# Altium PCB PCB1.PcbDoc (part 5 of 7)
Units mil, origin at the board's own origin, x right, y up, seen from the top; angles counter-clockwise.
Board outline 2100 x 2700 mil, 6 copper layers (Top Layer, Layer 2, Layer 3, Layer 4, Layer 5, Bottom Layer), stack 32.112 mil thick; 200 components, 319 nets, 1280 pads, 807 vias.
Unrouted connection lines stored in the file: 4.
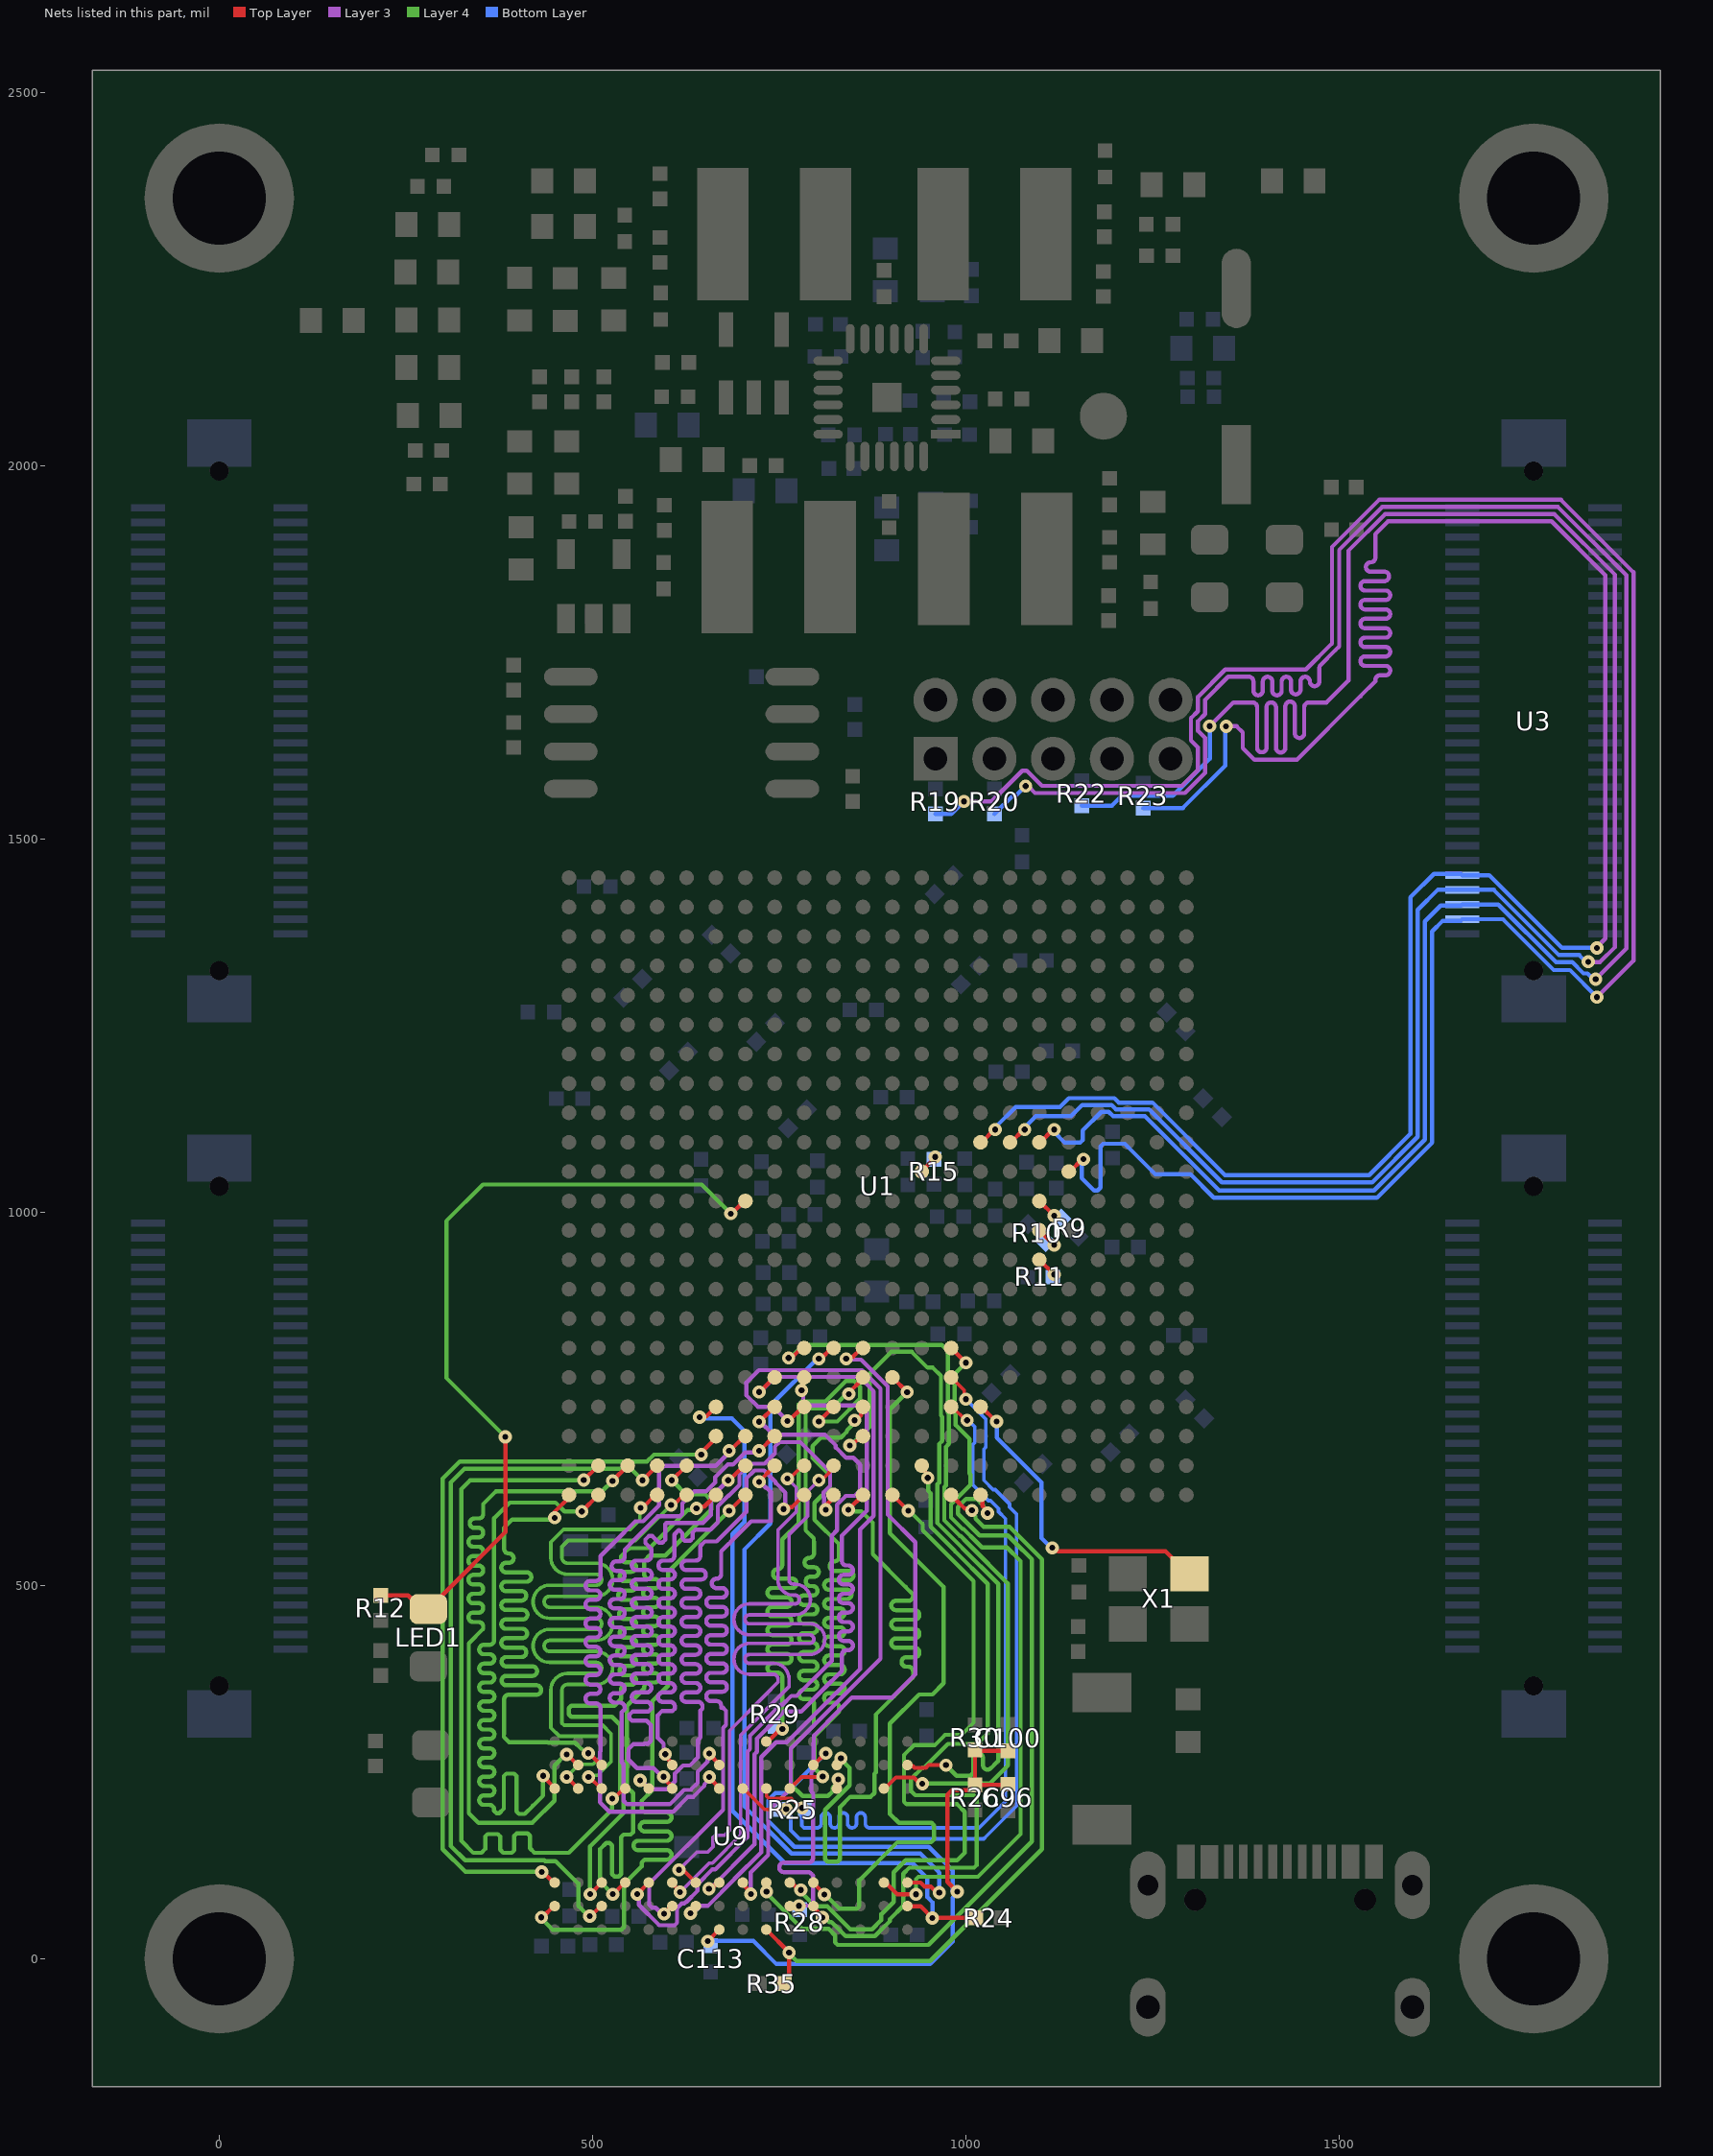
[diagram p9: the nets of this part, all layers, seen from the top]

## Via types
v1: diameter 17.7, hole 7.9, Top Layer to Bottom Layer, tented both sides, 807 vias

## Nets (pads, with @x,y where several pads share a name; then routed paths per layer and width w, separated by ;. In a path a pad name is that pad's centre, name@x,y a point inside that pad or via, vN(x,y) a via of type N, cw(c..) or ccw(c..) an arc to the next point about the centre after c; other vN are vias at no path point) (continued)
DDR3_A8: U1.L3 U9.T8 | length 981.2
  Top Layer w5.61: v1(844.29,687.33) 846.79,687.33 858.91,699.45 858.91,699.93 U1.L3@861.89,699.93 ; U9.T8@921.46,259.5 923.17,257.86 928.8,257.86 930.97,255.69 945.93,255.69 949.74,259.5 972.85,259.5 v1(973,259.34)
  Layer 4 w5.61: v1(844.29,687.33) 845.33,687.33 870.82,712.82 870.82,783.82 899.89,812.89 927.22,812.89 948.42,791.69 955.43,791.69 966.31,780.81 966.31,727.47 967.89,725.89 967.89,693.33 963.89,689.33 963.89,637.72 961.67,635.5 961.67,583.47 994.61,550.53 994.61,550.33 1043,501.94 1043,265 1041,263 1033.2,255.2 cw(c1028.74,259.65) 1022.43,259.65 1022.43,268.91 ccw(c1016.13,268.91) 1009.82,268.91 1009.82,251.3 cw(c1003.52,251.3) 1003.52,245 992,245 987.35,245 v1(973,259.34)
DDR3_A9: U1.P6 U9.R3 | length 978.1
  Top Layer w5.61: U9.R3@889.96,102.02 892.14,102.02 907.89,86.27 v1@932.85,86.27 ; U1.P6@980,818.04 v1(999.69,798.35)
  Layer 4 w5.61: v1@933,87 932.85,87.15 932.85,106.56 936.14,109.85 950,109.85 1015.85,109.85 1073,167 1073,532.52 1054.63,550.89 1021.23,550.89 1014.12,558 996.49,575.62 995.29,575.62 979.89,591.02 979.89,608.77 1005.83,634.71 1005.83,648.67 1004.65,649.85 1004.65,696.34 986.11,714.88 986.11,733.44 984.53,735.02 984.53,783.2 v1(999.69,798.35)
  other v1: 932.85,86.26
DDR3_A10: U1.L4 U9.L7 | length 1005.3
  Top Layer w5.61: U9.L7@763.98,228 764.3,227.99 779.83,243.52 807.6,243.52 v1(807.98,243.89) ; v1(850.62,721.23) 852.39,721.23 859.2,728.04 859.2,736.61 U1.L4@861.89,739.3
  Layer 4 w5.61: v1(807.98,243.89) 797,254.87 797,298 830,331 830,334 830,336.81 ccw(c823.69,336.81) 823.69,343.11 816.31,343.11 cw(c816.31,349.42) 816.31,355.72 831.08,355.72 ccw(c831.08,362.03) 831.08,368.33 816.31,368.33 cw(c816.31,374.64) 816.31,380.94 831.08,380.94 ccw(c831.08,387.25) 831.08,393.55 816.31,393.55 cw(c816.31,399.86) 816.31,406.16 831.08,406.16 ccw(c831.08,412.47) 831.08,418.77 816.31,418.77 cw(c816.31,425.08) 816.31,431.38 831.08,431.38 ccw(c831.08,437.69) 831.08,443.99 816.31,443.99 cw(c816.31,450.3) 816.31,456.6 831.08,456.6 ccw(c831.08,462.91) 831.08,469.21 816.31,469.21 cw(c816.31,475.52) 816.31,481.82 840.37,481.82 ccw(c840.37,488.13) 840.37,494.43 816.31,494.43 cw(c816.31,500.74) 816.31,507.04 842.88,507.04 ccw(c842.88,513.35) 842.88,519.65 823.69,519.65 cw(c823.69,525.96) 823.69,532.26 ccw(c823.69,538.57) 830,538.57 830,551 830,555 797,588 797,610.56 817.89,631.45 817.89,647.15 794.22,670.82 794.22,686.52 805.7,698 832.43,698 840.37,705.94 840.37,707.71 850.62,717.96 v1(850.62,721.23)
DDR3_A11: U1.J6 U9.R7 | length 1029.7
  Top Layer w5.61: v1(762.3,804.74) 764.62,807.05 768.35,807.05 779.34,818.04 U1.J6@783.15,818.04 ; U9.R7@889.96,228 891.18,227.99 906.08,242.89 929.91,242.89 938.21,234.59 v1(941.48,234.59)
  Layer 4 w5.61: v1(762.3,804.74) 764.62,804.74 781.89,822 967.49,822 975.42,814.07 975.42,731.24 977,729.66 977,689.56 973,685.56 973,633.95 970.78,631.73 970.78,587.25 991.51,566.51 992.22,566.51 1000.73,558 1004.51,554.23 1004.51,554.02 1056,502.53 1056,259 1031.59,234.59 v1(941.48,234.59)
DDR3_A12: U1.L5 U9.N7 | length 981.2
  Top Layer w5.61: U9.N7@826.97,228 827.91,228.93 827.91,239.21 v1(828.85,240.15) ; v1(842.85,756.41) 842.85,758.02 861.89,777.06 U1.L5@861.89,778.67
  Layer 4 w5.61: 796,558 796,563 785.11,573.89 785.11,733.66 788.4,736.95 820.17,736.95 839.63,756.41 v1(842.85,756.41) ; 796.31,558.74 796.31,543.3 cw(c790,543.3) 790,537 ccw(c790,530.7) 790,524.39 796.31,524.39 cw(c796.31,518.09) 796.31,511.78 791.55,511.78 ccw(c791.55,505.47) 791.55,499.17 794.7,499.17 cw(c794.7,492.86) 794.7,486.56 782.61,486.56 ccw(c782.61,480.26) 782.61,473.95 794.68,473.95 cw(c794.68,467.64) 794.68,461.34 782.61,461.34 ccw(c782.61,455.03) 782.61,448.73 794.65,448.73 cw(c794.65,442.43) 794.65,436.12 782.61,436.12 ccw(c782.61,429.82) 782.61,423.51 794.61,423.51 cw(c794.61,417.2) 794.61,410.9 782.61,410.9 ccw(c782.61,404.59) 782.61,398.29 794.56,398.29 cw(c794.56,391.99) 794.56,385.68 782.61,385.68 ccw(c782.61,379.38) 782.61,373.07 794.5,373.07 cw(c794.5,366.76) 794.5,360.46 782.61,360.46 ccw(c782.61,354.16) 782.61,347.85 790,347.85 cw(c790,341.55) 796.31,341.55 796.31,338.74 796.31,333.31 796,333 796,312.89 765.31,282.2 765.31,233.69 781,218 815.12,218 821.08,223.97 821.08,229.12 828.85,236.88 v1(828.85,240.15)
DDR3_A13: U1.K6 U9.T3 | length 1040.5
  Top Layer w5.61: v1(802.83,803.57) 805.44,803.57 819.91,818.04 U1.K6@822.52,818.04 ; U9.T3@921.46,102.02 939.06,102.02 944.41,96.67 952.87,96.67 960.88,88.66 v1(964.15,88.66)
  Bottom Layer w5.61: v1@802,805 738,741 738,583 703,548 703,333 703,204.12 766.23,140.89 938.77,140.89 950,129.66 964.15,115.51 v1(964.15,88.66)
DDR3_BA0: U1.N2 U9.M2 | length 1024.4
  Top Layer w5.61: U9.M2@795.48,70.51 795.48,68.98 807.71,56.75 v1(807.71,55.22) ; U1.N2@940.63,660.56 940.63,656.75 946.42,650.96 946.42,646.31 v1(948.73,644)
  Layer 4 w5.61: v1(807.71,55.22) 810.98,55.22 817.03,49.17 819.68,49.17 838.54,30.31 877.84,30.31 898.11,50.58 898.11,53.11 916,71 916,114 924,122 950,122 1010.71,122 1014,125.29 1014,215.71 1010.71,219 950,219 932,219 926,225 926,240.54 941.15,255.69 943.52,255.69 950,262.17 975.6,287.77 1014.77,287.77 1029,302 1029,502 985,546 985,546.55 952.56,578.99 952.56,623.37 949.2,626.74 949.2,643.54 v1(948.73,644)
DDR3_BA1: U1.L1 U9.N8 | length 997.4
  Top Layer w5.61: U9.N8@826.97,259.5 826.97,261.33 832.28,266.64 v1(832.28,268.47) ; v1(842.47,601.5) 842.47,601.63 861.89,621.06 U1.L1@861.89,621.19
  Layer 4 w5.61: v1(832.28,268.47) 832.28,267.46 844,255.74 844,232.27 811.14,199.41 811.14,133.43 814.43,130.14 827.71,130.14 831,133.43 831,203 845,217 872.27,217 877.31,222.04 877.31,247.85 879.03,249.57 879.03,327.03 903.92,351.92 929,377 929,384.93 ccw(c922.69,384.93) 922.69,391.23 919.86,391.23 cw(c919.86,397.54) 919.86,403.84 931.09,403.84 ccw(c931.09,410.15) 931.09,416.45 906.1,416.45 cw(c906.1,422.76) 906.1,429.06 931.09,429.06 ccw(c931.09,435.37) 931.09,441.67 906.1,441.67 cw(c906.1,447.98) 906.1,454.28 931.09,454.28 ccw(c931.09,460.59) 931.09,466.89 906.1,466.89 cw(c906.1,473.2) 906.1,479.5 922.69,479.5 ccw(c922.69,485.81) 929,485.81 929,488 918.93,498.07 875,542 875,584 859.73,599.27 844.7,599.27 v1(842.47,601.5)
DDR3_BA2: U1.M5 U9.M3 | length 992.3
  Top Layer w5.61: U9.M3@795.48,102.01 795.48,101.4 810.15,86.73 v1(810.15,86.12) ; U1.M5@901.26,778.67 v1(920.95,758.98)
  Layer 4 w5.61: v1(810.15,86.12) 811.13,86.12 830.33,66.91 853.71,66.91 857,70.2 857,105 908,156 953,156 957,160 957,178.71 953.71,182 910,182 898,194 898,315 937,354 955,354 970,369 970,498 898,570 898,736.04 v1(920.95,758.98)
DDR3_CAS_N: U1.R1 U9.K3 | length 1055
  Top Layer w5.61: U9.K3@732.48,102.02 732.65,101.85 732.65,90.12 v1(732.82,89.95) ; U1.R1@1019.37,621.19 1022.06,618.5 1022.06,606.21 1028.72,599.55 v1(1028.72,596.88)
  Layer 4 w5.61: v1(732.82,89.95) 732.82,87.89 780.64,40.07 815.9,40.07 824.78,31.19 824.78,21.92 828.07,18.63 949.63,18.63 950,19 1088,157 1088,535.07 1065.07,558 1056.07,567 1018,567 989,596 989,605 1000,616 1013.76,616 1022.99,606.77 1022.99,605.88 1028.72,600.15 v1(1028.72,596.88)
DDR3_CKE: R29.1 U1.K4 U9.K9 | length 980.3
  Top Layer w5.61: U9.K9@732.48,290.99 734.78,290.98 751.44,307.64 v1(753.95,307.64) ; v1(802.88,719.61) U1.K4@822.52,739.3
  Layer 4 w5.61: v1(753.95,307.64) 753.95,333 753.95,374 753.95,376.81 ccw(c747.65,376.81) 747.65,383.11 740.26,383.11 cw(c740.26,389.42) 740.26,395.72 760.08,395.72 ccw(c760.08,402.03) 760.08,408.33 740.26,408.33 cw(c740.26,414.64) 740.26,420.94 760.08,420.94 ccw(c760.08,427.25) 760.08,433.55 740.26,433.55 cw(c740.26,439.86) 740.26,446.16 760.08,446.16 ccw(c760.08,452.47) 760.08,458.77 740.26,458.77 cw(c740.26,465.08) 740.26,471.38 760.08,471.38 ccw(c760.08,477.69) 760.08,483.99 740.26,483.99 cw(c740.26,490.3) 740.26,496.6 766.69,496.6 ccw(c766.69,502.91) 766.69,509.21 747.65,509.21 cw(c747.65,515.52) 747.65,521.82 ccw(c747.65,528.13) 753.95,528.13 753.95,552 753.95,558 753.95,561.95 776,584 776,742.77 779.29,746.06 811.06,746.06 839,774 850,774 858,766 858,750.04 827.58,719.61 v1(802.88,719.61)
DDR3_CLK_N: R25.1 U1.P4 U9.K7 | length 1031.8
  Top Layer w4.77: U9.K7@732.48,228 732.9,227.58 732.9,217.82 735.69,215.02 765.27,215.02 778.27,202.02 v1(780.28,202.02) ; U1.P4@980,739.3 981.56,739.3 999.7,721.16 v1(1001.27,721.16)
  Bottom Layer w4.77: v1(780.28,202.02) 780,201.74 780,178.11 781,177.11 782.79,175.32 800.22,175.32 ccw(c800.22,181.2) 806.11,181.2 806.11,189.43 cw(c811.99,189.43) 817.88,189.43 817.88,181.2 ccw(c823.76,181.2) 829.65,181.2 829.65,189.43 cw(c835.53,189.43) 841.42,189.43 841.42,181.2 ccw(c847.3,181.2) 853.19,181.2 853.19,189.43 cw(c859.07,189.43) 864.96,189.43 864.96,181.2 ccw(c870.84,181.2) 870.84,175.32 885,175.32 1017.32,175.32 1052.73,210.74 1052.73,589.38 1043.46,598.66 1043.46,602.98 1032.82,613.62 1030.05,613.62 1008.97,634.7 1008.97,688.64 1011.48,691.15 1011.48,712.68 1003.01,721.16 v1(1001.27,721.16)
DDR3_CLK_P: R25.2 U1.P5 U9.J7 | length 1039.7
  Top Layer w4.77: U9.J7@700.99,227.99 701.85,227.99 717.03,212.81 729.58,200.25 v1(759.15,200.25) ; U1.P5@980,778.67 997.37,761.3 997.37,751.86 v1(999.69,749.55)
  Bottom Layer w4.77: v1(759.15,200.25) 759.15,197.07 765.23,191 765.23,171.99 776.68,160.55 885,160.55 950,160.55 1023.43,160.55 1027.76,164.87 1067.51,204.62 1067.51,558 1067.51,595.49 1058.23,604.77 1058.23,609.1 1038.94,628.39 1036.16,628.39 1023.73,640.81 1023.73,682.52 1026.25,685.03 1026.25,722.98 v1(999.69,749.55)
DDR3_CS_N: R28.1 U1.L6 U9.L2 | length 1010.3
  Top Layer w5.61: U9.L2@763.98,70.52 764.23,70.77 775.79,70.77 v1(776.05,71.03) ; v1(839.36,803.57) 841.67,805.89 848.22,805.89 858.22,815.89 858.22,818.04 U1.L6@861.89,818.04
  Layer 3 w5.61: v1(776.05,71.03) 776.36,71.34 790.82,71.34 795,75.52 795,107 795,111.57 792.3,114.26 ccw(c787.85,109.81) 787.85,116.11 756.02,116.11 cw(c756.02,122.42) 756.02,128.72 788.62,128.72 ccw(c788.62,135.03) 794.93,135.03 794.93,159.85 795.15,160.07 795.15,182 795.15,195.01 795.44,195.29 795.44,221.43 792.82,224.04 792.82,250.17 795.62,252.97 795.62,289 796,289.38 796,298.82 830.18,333 847.18,350 901,350 932,381 932,558 895,595 895,766.88 859.43,802.45 840.48,802.45 v1(839.36,803.57)
DDR3_DQ0: U1.H4 U9.E3 | length 1022.9
  Top Layer w5.61: v1(559.48,86.49) U9.E3@575,102.02 ; v1(722.85,719.18) 723.25,719.18 743.37,739.3 U1.H4@743.78,739.3
  Layer 3 w5.61: v1(559.48,86.49) 561.79,84.17 561.79,72.21 589,45 609.71,45 613,48.29 613,67.82 619.22,74.04 622.61,74.04 624.72,76.16 625.39,76.16 640.43,91.19 640.43,100 659.97,119.54 663.92,119.54 707.36,162.98 707.36,277.55 710.66,280.86 710.66,298.66 745,333 752.11,340.11 754.11,340.11 766,352 773,352 820,399 820,558 820,566.59 827.31,573.9 827.31,608.31 839,620 851,620 858,627 858,662 849,671 839.19,671 825.44,684.75 825.44,687.43 810.75,702.11 741.6,702.11 724.52,719.18 v1(722.85,719.18)
DDR3_DQ1: U1.G2 U9.F7 | length 993.2
  Top Layer w5.61: v1(595.01,243.82) 595.01,241.65 606.5,230.16 U9.F7@606.5,228 ; v1(681.31,640.87) 683.02,640.87 702.71,660.56 U1.G2@704.41,660.56
  Layer 3 w5.61: 547.69,276 547.69,267 559.37,255.32 581.45,255.32 592.96,243.82 v1(595.01,243.82) ; 548,276 548,281 554.5,287.5 568.67,287.5 569.17,288 574,288 578,292 578,313 572,319 552.51,319 549.22,322.29 549.22,326.93 553.29,331 574.38,331 578.38,335 578.38,337.81 ccw(c572.07,337.81) 572.07,344.11 558.57,344.11 cw(c558.57,350.42) 558.57,356.72 572.26,356.72 ccw(c572.26,363.03) 572.26,369.33 558.57,369.33 cw(c558.57,375.64) 558.57,381.94 572.81,381.94 ccw(c572.81,388.25) 572.81,394.55 558.57,394.55 cw(c558.57,400.86) 558.57,407.16 572.81,407.16 ccw(c572.81,413.47) 572.81,419.77 558.57,419.77 cw(c558.57,426.08) 558.57,432.38 572.81,432.38 ccw(c572.81,438.69) 572.81,444.99 558.57,444.99 cw(c558.57,451.3) 558.57,457.6 572.81,457.6 ccw(c572.81,463.91) 572.81,470.21 558.57,470.21 cw(c558.57,476.52) 558.57,482.82 572.81,482.82 ccw(c572.81,489.13) 572.81,495.43 558.57,495.43 cw(c558.57,501.74) 558.57,508.04 572.81,508.04 ccw(c572.81,514.35) 572.81,520.65 558.57,520.65 cw(c558.57,526.96) 558.57,533.26 572.07,533.26 ccw(c572.07,539.57) 578.38,539.57 578.38,549.07 570.55,556.9 570.55,561.55 575.18,566.18 579.82,566.18 588,558 588.68,557.32 593.32,557.32 597,561 597,582 ; 598.61,583.61 647.61,583.61 658.35,594.35 658.35,617.91 v1(681.31,640.87)
DDR3_DQ2: U1.H2 U9.F2 | length 1013.5
  Top Layer w5.61: v1(595.72,60.16) 595.93,60.16 606.29,70.52 U9.F2@606.5,70.52 ; v1(722.85,638.84) 722.85,639.23 743.78,660.17 U1.H2@743.78,660.56
  Layer 3 w5.61: v1(595.72,60.16) 592.44,60.16 584.26,68.34 579.66,68.34 575.69,72.31 575.69,100.67 674.6,199.58 674.6,309.19 678.51,313.1 678.51,332.11 673.62,337 ; 672.05,336.01 672.05,338.81 ccw(c665.74,338.81) 665.74,345.12 658.35,345.12 cw(c658.35,351.42) 658.35,357.73 673.51,357.73 ccw(c673.51,364.03) 673.51,370.34 658.35,370.34 cw(c658.35,376.64) 658.35,382.95 673.51,382.95 ccw(c673.51,389.25) 673.51,395.56 658.35,395.56 cw(c658.35,401.86) 658.35,408.17 673.51,408.17 ccw(c673.51,414.47) 673.51,420.78 658.35,420.78 cw(c658.35,427.08) 658.35,433.39 673.51,433.39 ccw(c673.51,439.69) 673.51,446 658.35,446 cw(c658.35,452.3) 658.35,458.61 673.51,458.61 ccw(c673.51,464.91) 673.51,471.22 658.35,471.22 cw(c658.35,477.52) 658.35,483.83 673.19,483.83 ccw(c673.19,490.13) 673.19,496.44 665.74,496.44 cw(c665.74,502.74) 665.74,509.05 ccw(c665.74,515.35) 672.05,515.35 672.05,545.63 682.68,556.26 ; 684.25,557.25 684.25,558 684.25,558.05 712.1,585.9 738.31,585.9 738.31,625.48 733.06,630.72 732.13,630.72 724.01,638.84 v1(722.85,638.84)
DDR3_DQ3: U1.K1 U9.F8 | length 1003.2
  Top Layer w5.61: v1(597.18,273.93) 597.18,271.14 606.5,261.81 U9.F8@606.5,259.5 ; v1(812.15,601.5) 814.47,603.82 814.47,609.33 822.52,617.38 U1.K1@822.52,621.19
  Layer 3 w5.61: v1(597.18,273.93) 594.86,276.24 594.86,288.14 587.11,295.89 587.11,326.11 593,332 607,332 610,335 610,337.81 ccw(c603.69,337.81) 603.69,344.11 593.74,344.11 cw(c593.74,350.42) 593.74,356.72 603.7,356.72 ccw(c603.7,363.03) 603.7,369.33 594.3,369.33 cw(c594.3,375.64) 594.3,381.94 603.74,381.94 ccw(c603.74,388.25) 603.74,394.55 594.3,394.55 cw(c594.3,400.86) 594.3,407.16 603.74,407.16 ccw(c603.74,413.47) 603.74,419.77 594.3,419.77 cw(c594.3,426.08) 594.3,432.38 603.74,432.38 ccw(c603.74,438.69) 603.74,444.99 594.3,444.99 cw(c594.3,451.3) 594.3,457.6 603.74,457.6 ccw(c603.74,463.91) 603.74,470.21 594.3,470.21 cw(c594.3,476.52) 594.3,482.82 603.74,482.82 ccw(c603.74,489.13) 603.74,495.43 594.3,495.43 cw(c594.3,501.74) 594.3,508.04 603.74,508.04 ccw(c603.74,514.35) 603.74,520.65 594.3,520.65 cw(c594.3,526.96) 594.3,533.26 602.98,533.26 ccw(c602.98,539.57) 609.29,539.57 609.29,552.42 609.29,568.29 615,574 616,574 620,570 620,563.29 623.29,560 630.71,560 634,563.29 634,571.21 637.29,574.5 657.5,574.5 667.46,584.46 667.46,606.18 681.67,620.39 682.26,620.39 696.47,634.6 696.47,648.9 710.68,663.11 730.11,663.11 744,677 744,686 750,692 778,692 817.89,652.11 817.89,633.54 809.38,625.03 809.38,618.77 809.84,618.31 809.84,603.82 v1(812.15,601.5)
DDR3_DQ4: U1.J5 U9.H3 | length 1008.1
  Top Layer w5.61: v1(655.58,93.72) 657.9,96.04 661.2,96.04 667.17,102.01 U9.H3@669.49,102.02 ; v1(779.65,761.21) 781.4,762.97 781.4,776.92 U1.J5@783.15,778.67
  Layer 3 w5.61: v1(655.58,93.72) 657.09,93.72 716.47,153.11 716.47,273.78 719.77,277.08 719.77,294.89 747.68,322.79 747.86,322.79 756.06,331 779,331 808,360 833.61,385.61 833.61,406.94 cw(c839.91,406.94) 839.91,413.25 842.09,413.25 ccw(c842.09,419.55) 842.09,425.86 835.91,425.86 cw(c835.91,432.16) 835.91,438.47 842.09,438.47 ccw(c842.09,444.77) 842.09,451.08 835.91,451.08 cw(c835.91,457.38) 835.91,463.69 842.09,463.69 ccw(c842.09,469.99) 842.09,476.3 835.91,476.3 cw(c835.91,482.6) 835.91,488.91 842.09,488.91 ccw(c842.09,495.21) 842.09,501.52 835.91,501.52 cw(c835.91,507.82) 835.91,514.13 842.09,514.13 ccw(c842.09,520.43) 842.09,526.74 839.91,526.74 cw(c839.91,533.04) 833.61,533.04 833.61,550.2 833.61,566.61 867.11,600.11 867.11,731.21 857.07,741.26 788.07,741.26 781.96,747.37 781.96,758.9 v1(779.65,761.21)
DDR3_DQ5: U1.H3 U9.H8 | length 1024
  Top Layer w5.61: v1(656.15,275.02) 656.15,273.93 669.49,260.59 U9.H8@669.49,259.5 ; v1(722.85,680.24) 723.47,680.24 743.16,699.93 U1.H3@743.78,699.93
  Layer 3 w5.61: 542.82,334.01 542.82,336.81 ccw(c536.51,336.81) 536.51,343.12 529.12,343.12 cw(c529.12,349.42) 529.12,355.73 536.51,355.73 ccw(c536.51,362.03) 536.51,368.34 529.12,368.34 cw(c529.12,374.64) 529.12,380.95 536.51,380.95 ccw(c536.51,387.25) 536.51,393.56 529.12,393.56 cw(c529.12,399.86) 529.12,406.17 536.51,406.17 ccw(c536.51,412.47) 536.51,418.78 529.12,418.78 cw(c529.12,425.08) 529.12,431.39 536.51,431.39 ccw(c536.51,437.69) 536.51,444 529.12,444 cw(c529.12,450.3) 529.12,456.61 536.51,456.61 ccw(c536.51,462.91) 536.51,469.22 529.12,469.22 cw(c529.12,475.52) 529.12,481.83 536.51,481.83 ccw(c536.51,488.13) 536.51,494.44 529.12,494.44 cw(c529.12,500.74) 529.12,507.05 536.51,507.05 ccw(c536.51,513.35) 536.51,519.66 531.62,519.66 cw(c531.62,525.96) 531.62,532.27 536.51,532.27 ccw(c536.51,538.57) 542.82,538.57 542.82,547.99 549.93,555.1 ; 543.39,335 538.58,330.19 538.58,263.23 541.24,260.56 541.24,211.76 546,207 603.13,207 622.19,226.06 631.04,226.06 640.48,235.5 640.48,250.66 653.84,264.02 653.84,272.71 v1(656.15,275.02) ; 550.5,556.09 552.41,558 587.13,592.72 616.71,592.72 620,596.01 620,610 636,626 652,626 664,638 664,645 681,662 688,662 703.93,677.93 720.53,677.93 v1(722.85,680.24)
DDR3_DQ6: U1.H5 U9.G2 | length 1028
  Top Layer w5.61: v1(631,61) 631,62.26 638,69.26 U9.G2@638,70.51 ; v1(722.85,759.03) 723.49,759.03 743.13,778.67 U1.H5@743.78,778.67
  Layer 3 w5.61: v1(631,61) 634.27,61 644.05,70.78 654.07,70.78 689.82,106.53 689.82,106.82 725.58,142.58 725.58,270.01 745.57,290 760,290 858,388 858,575 876.22,593.22 876.22,759.9 856.81,779.31 744.42,779.31 724.14,759.03 v1(722.85,759.03)
DDR3_DQ7: U1.G3 U9.H7 | length 1018.5
  Top Layer w5.61: v1(656.15,243.52) 656.15,242.43 669.49,229.09 U9.H7@669.49,228 ; v1(682.62,680.24) 683.67,680.24 703.36,699.93 U1.G3@704.41,699.93
  Layer 3 w5.61: v1(656.15,243.52) 656.15,240.25 649.59,233.68 649.59,231.72 634.81,216.95 627.58,216.95 607.63,197 522.25,197 509.58,209.67 509.58,277.08 510.39,277.89 510.39,333 510.39,335.81 ccw(c504.09,335.81) 504.09,342.11 496.69,342.11 cw(c496.69,348.42) 496.69,354.72 504.09,354.72 ccw(c504.09,361.03) 504.09,367.33 496.69,367.33 cw(c496.69,373.64) 496.69,379.94 504.09,379.94 ccw(c504.09,386.25) 504.09,392.55 496.69,392.55 cw(c496.69,398.86) 496.69,405.16 504.09,405.16 ccw(c504.09,411.47) 504.09,417.77 496.69,417.77 cw(c496.69,424.08) 496.69,430.38 504.09,430.38 ccw(c504.09,436.69) 504.09,442.99 496.69,442.99 cw(c496.69,449.3) 496.69,455.6 504.09,455.6 ccw(c504.09,461.91) 504.09,468.21 496.69,468.21 cw(c496.69,474.52) 496.69,480.82 504.09,480.82 ccw(c504.09,487.13) 504.09,493.43 496.69,493.43 cw(c496.69,499.74) 496.69,506.04 504.09,506.04 ccw(c504.09,512.35) 510.39,512.35 510.39,526 510.39,539.39 529,558 557,586 567.53,586 589,607.47 589,654 595.11,660.11 664.59,660.11 682.62,678.14 v1(682.62,680.24)
DDR3_DQ8: U1.B2 U9.D7 | length 1021.5
  Top Layer w5.61: v1(487.87,641.16) 488.01,641.16 507.42,660.56 U1.B2@507.56,660.56 ; v1(526.09,214.6) 528.1,214.6 541.5,227.99 U9.D7@543.51,227.99
  Layer 4 w5.61: v1(487.87,641.16) 487.56,640.84 405,640.84 335.84,640.84 324,629 324,158 340,142 351,142 356,147 356,163.71 359.29,167 372.71,167 376,163.71 376,146 380,142 391.71,142 395,145.29 395,164.71 398.29,168 412.71,168 416,164.71 416,148 422,142 468,142 526.09,200.09 v1(526.09,214.6)
DDR3_DQ9: U1.F1 U9.C3 | length 1018.4
  Top Layer w5.61: v1(496.49,86.49) U9.C3@512.01,102.02 ; v1(638.91,603.12) 641.23,605.43 649.28,605.43 U1.F1@665.04,621.19
  Layer 4 w5.61: v1(496.49,86.49) v1@498,88 ; v1@497,89 496.49,89.51 496.49,150.49 541.24,195.24 541.24,220.87 536.89,225.23 536.89,313.11 526,324 471.29,324 468,327.29 468,335.65 471.29,338.93 528.93,338.93 529,339 538,348 538,360.72 cw(c544.31,360.72) 544.31,367.03 551.69,367.03 ccw(c551.69,373.33) 551.69,379.64 542.24,379.64 cw(c542.24,385.94) 542.24,392.25 551.69,392.25 ccw(c551.69,398.55) 551.69,404.86 539.2,404.86 cw(c539.2,411.16) 539.2,417.47 551.69,417.47 ccw(c551.69,423.77) 551.69,430.08 542.24,430.08 cw(c542.24,436.38) 542.24,442.69 551.69,442.69 ccw(c551.69,448.99) 551.69,455.3 541.52,455.3 cw(c541.52,461.6) 541.52,467.91 551.69,467.91 ccw(c551.69,474.21) 551.69,480.52 540.5,480.52 cw(c540.5,486.82) 540.5,493.13 551.69,493.13 ccw(c551.69,499.43) 551.69,505.74 542.24,505.74 cw(c542.24,512.04) 542.24,518.35 551.69,518.35 ccw(c551.69,524.65) 551.69,530.96 544.31,530.96 cw(c544.31,537.26) 538,537.26 538,539 548.18,549.18 549,550 576,550 627,601 ; 627.65,601.19 636.98,601.19 v1(638.91,603.12)
DDR3_DQ10: U1.A1 U9.C8 | length 1032.2
  Top Layer w5.61: v1(449.16,590.66) 448.5,591.32 448.5,598.12 468.19,617.8 U1.A1@468.19,621.19 ; v1(494.22,275.26) 495.23,275.26 511,259.5 U9.C8@512.01,259.5
  Layer 4 w5.61: 381,302 381,297 388,290 420,290 439.79,290 440.48,289.31 476.4,289.31 484.4,281.31 484.9,281.31 490.95,275.26 v1(494.22,275.26) ; 381,570 381,577 392.34,588.34 405,588.34 446.85,588.34 v1(449.16,590.66) ; 381.43,301.01 381.43,332 381.43,347.42 cw(c387.73,347.42) 387.73,353.72 424.7,353.72 ccw(c424.7,360.03) 424.7,366.33 384.31,366.33 cw(c384.31,372.64) 384.31,378.94 419.23,378.94 ccw(c419.23,385.25) 419.23,391.55 384.31,391.55 cw(c384.31,397.86) 384.31,404.16 404.7,404.16 ccw(c404.7,410.47) 404.7,416.77 383.92,416.77 cw(c383.92,423.08) 383.92,429.38 405.81,429.38 ccw(c405.81,435.69) 405.81,441.99 383.91,441.99 cw(c383.91,448.3) 383.91,454.6 406.35,454.6 ccw(c406.35,460.91) 406.35,467.21 383.91,467.21 cw(c383.91,473.52) 383.91,479.82 404.7,479.82 ccw(c404.7,486.13) 404.7,492.43 383.91,492.43 cw(c383.91,498.74) 383.91,505.04 411.55,505.04 ccw(c411.55,511.35) 411.55,517.65 383.91,517.65 cw(c383.91,523.96) 383.91,530.26 387.73,530.26 ccw(c387.73,536.57) 387.73,542.87 cw(c387.73,549.18) 381.43,549.18 381.43,569.01
DDR3_DQ11: U1.D2 U9.C2 | length 1048.7
  Top Layer w5.61: v1(495.98,57.16) 497.31,57.16 510.67,70.51 U9.C2@512.01,70.52 ; v1(566.61,640.87) U1.D2@586.3,660.56
  Layer 4 w5.61: 480,101 450.11,130.89 436.23,130.89 435.23,131.89 420,131.89 329.11,131.89 310,151 310,638 328.31,656.31 405,656.31 551.18,656.31 v1(566.61,640.87) ; 481,101 481,70.53 494.37,57.16 v1(495.98,57.16)
DDR3_DQ12: U1.B1 U9.A7 | length 1048.3
  Top Layer w5.61: v1(433.5,245.16) 433.5,244.34 449.02,228.81 U9.A7@449.02,228 ; v1(485.47,599.1) U1.B1@507.56,621.19
  Layer 4 w5.61: v1@431.51,245.51 431.86,245.16 v1(433.5,245.16) 433.5,218.5 420,205 409,194 401.29,194 398,197.29 398,244.71 394.71,248 384.29,248 381,244.71 381,201 375,195 371.29,195 369.29,197 368,198.29 368,199.81 ccw(c361.7,199.81) 361.7,206.11 354.3,206.11 cw(c354.3,212.42) 354.3,218.72 362.09,218.72 ccw(c362.09,225.03) 362.09,231.33 354.3,231.33 cw(c354.3,237.64) 354.3,243.94 362.09,243.94 ccw(c362.09,250.25) 362.09,256.55 354.3,256.55 cw(c354.3,262.86) 354.3,269.16 362.09,269.16 ccw(c362.09,275.47) 362.09,281.77 354.3,281.77 cw(c354.3,288.08) 354.3,294.38 362.09,294.38 ccw(c362.09,300.69) 362.09,306.99 354.3,306.99 cw(c354.3,313.3) 354.3,319.6 362.09,319.6 ccw(c362.09,325.91) 362.09,332.21 354.3,332.21 cw(c354.3,338.52) 354.3,344.82 362.09,344.82 ccw(c362.09,351.13) 362.09,357.43 354.3,357.43 cw(c354.3,363.74) 354.3,370.04 362.09,370.04 ccw(c362.09,376.35) 362.09,382.65 354.3,382.65 cw(c354.3,388.96) 354.3,395.26 362.09,395.26 ccw(c362.09,401.57) 362.09,407.87 354.3,407.87 cw(c354.3,414.18) 354.3,420.48 361.7,420.48 ccw(c361.7,426.79) 368,426.79 368,444.58 368,590 389,611 450.25,611 462.15,599.1 481.1,599.1 v1@483,601
DDR3_DQ13: U1.G1 U9.A2 | length 1026.3
  Top Layer w5.61: v1(431.26,55.53) 432.65,55.53 447.64,70.52 U9.A2@449.02,70.52 ; v1(682.62,599.91) 682.87,599.91 701.05,618.08 704.41,618.08 U1.G1@704.41,621.19
  Layer 4 w5.61: v1(431.26,55.53) 431.26,53.86 446.15,38.97 538.71,38.97 542,42.25 542,100.12 550.88,109 565.5,123.62 565.5,126.53 cw(c571.81,126.53) 571.81,132.84 599.19,132.84 ccw(c599.19,139.14) 599.19,145.45 560.93,145.45 cw(c560.93,151.75) 560.93,158.06 599.19,158.06 ccw(c599.19,164.36) 599.19,170.67 569.41,170.67 cw(c569.41,176.97) 569.41,183.28 599.19,183.28 ccw(c599.19,189.58) 599.19,195.89 571.81,195.89 cw(c571.81,202.19) 565.5,202.19 565.5,205 565.5,211.5 579.86,225.86 579.86,344.86 601,366 601,518.29 640.71,558 v1(682.62,599.91)
DDR3_DQ14: U1.C2 U9.B8 | length 1029.3
  Top Layer w5.61: v1(465,273.64) 465.69,273.64 479.83,259.49 U9.B8@480.52,259.49 ; v1(526.47,640.1) U1.C2@546.93,660.56
  Layer 4 w5.61: v1(465,273.64) 463.62,273.64 448.65,258.67 448.65,211.65 419,182 347,182 334,195 334,422.52 353.39,441.91 353.39,444.71 ccw(c347.09,444.71) 347.09,451.02 339.91,451.02 cw(c339.91,457.32) 339.91,463.63 347.09,463.63 ccw(c347.09,469.93) 347.09,476.24 339.91,476.24 cw(c339.91,482.54) 339.91,488.85 347.09,488.85 ccw(c347.09,495.15) 347.09,501.46 339.91,501.46 cw(c339.91,507.76) 339.91,514.07 347.09,514.07 ccw(c347.09,520.37) 347.09,526.68 339.91,526.68 cw(c339.91,532.98) 339.91,539.29 347.09,539.29 ccw(c347.09,545.59) 347.09,551.9 339.91,551.9 cw(c339.91,558.2) 339.91,564.51 347.09,564.51 ccw(c347.09,570.81) 347.09,577.12 341.55,577.12 cw(c341.55,583.42) 341.55,589.73 347.09,589.73 ccw(c347.09,596.03) 353.39,596.03 353.39,608.98 370.08,625.67 370.41,626 512.37,626 526.37,640 v1@526.47,640
DDR3_DQ15: U1.F3 U9.A3 | length 1057.1
  Top Layer w5.61: v1(431.81,116.39) 433.23,116.39 447.61,102.02 U9.A3@449.02,102.02 ; v1(645.35,675.26) 645.35,677.75 665.04,697.44 U1.F3@665.04,699.93
  Layer 4 w5.61: v1(431.81,116.39) 431.69,116.51 420,116.51 329.49,116.51 299.11,146.89 299.11,643.11 322.11,666.11 405,666.11 572.89,666.11 582.05,675.26 v1(645.35,675.26)
DDR3_DQS_N0: U1.J2 U9.G3 | length 1001.3
  Top Layer w4.77: v1(615.63,119.18) 616.81,118 622.02,118 U9.G3@638,102.01 ; v1(760.85,642.92) 763.18,642.92 780.82,660.56 U1.J2@783.15,660.56
  Layer 3 w4.77: v1(615.63,119.18) 639.45,143 654.21,143 661.1,149.9 661.1,162.6 663.9,165.4 676.6,165.4 683.29,172.08 683.29,305.59 729.7,352 748,370.3 748,375.04 ccw(c742.12,375.04) 742.12,380.93 709.66,380.93 cw(c709.66,401.58) 689.01,401.58 cw(c709.66,401.58) 709.66,422.24 790.16,422.24 ccw(c790.16,428.12) 796.04,428.12 ccw(c790.16,428.12) 790.16,434.01 709.66,434.01 cw(c709.66,454.66) 689.01,454.66 cw(c709.66,454.66) 709.66,475.32 770.79,475.32 ccw(c770.79,481.2) 776.68,481.2 ccw(c770.79,481.2) 770.79,487.08 768.65,487.08 cw(c768.65,507.74) 748,507.74 748,556.93 748,574 772.65,598.65 772.65,631.12 v1(760.85,642.92)
DDR3_DQS_N1: U1.D1 U9.B7 | length 1029
  Top Layer w4.77: v1(465,243.52) U9.B7@480.52,227.99 ; v1(564.1,604.01) 566.61,604.01 583.79,621.19 U1.D1@586.3,621.19
  Layer 4 w4.77: v1@465,244 465.48,244 482.01,260.53 500.32,260.53 509.89,270.1 509.89,295.21 507.1,298 455.45,298 444,309.45 444,334.11 444,359.99 cw(c466.15,359.99) 466.15,382.14 504.59,382.14 ccw(c504.59,389.53) 504.59,396.91 442.35,396.91 cw(c442.35,419.07) 442.35,441.22 504.59,441.22 ccw(c504.59,448.61) 504.59,455.99 442.35,455.99 cw(c442.35,478.15) 442.35,500.3 504.59,500.3 ccw(c504.59,507.69) 504.59,515.07 466.15,515.07 cw(c466.15,537.23) 444,537.23 444,547 444,558 461,575 550,575 563.01,588.01 563.01,602.91 v1(564.1,604.01) v1@564.1,602.37
DDR3_DQS_P0: U1.K2 U9.F3 | length 1010.8
  Top Layer w4.77: U9.F3@606.5,102.02 606.5,100.85 617,90.36 v1(617,89.19) ; v1(802.73,640.87) 806.01,640.87 809.28,644.14 809.38,644.14 822.52,657.29 U1.K2@822.52,660.56
  Layer 3 w4.77: v1(617,89.19) 656.04,128.23 660.32,128.23 698.06,165.97 698.06,299.47 750.59,352 762.77,364.18 762.77,375.04 ccw(c742.12,375.04) 742.12,395.7 709.66,395.7 cw(c709.66,401.58) 703.78,401.58 cw(c709.66,401.58) 709.66,407.47 790.16,407.47 ccw(c790.16,428.12) 810.81,428.12 ccw(c790.16,428.12) 790.16,448.78 709.66,448.78 cw(c709.66,454.66) 703.78,454.66 cw(c709.66,454.66) 709.66,460.55 770.79,460.55 ccw(c770.79,481.2) 791.45,481.2 ccw(c770.79,481.2) 770.79,501.85 768.65,501.85 cw(c768.65,507.74) 762.77,507.74 762.77,556.93 762.77,567.88 787.61,592.72 787.61,616.46 787.42,616.65 787.42,625.46 802.73,640.77 v1(802.73,640.87)
DDR3_DQS_P1: U1.E1 U9.C7 | length 1030.8
  Top Layer w4.77: v1(494.43,243.52) 495.46,243.52 510.98,228 U9.C7@512.01,228 ; v1(604.85,607.88) 608.34,607.88 621.66,621.19 U1.E1@625.67,621.19
  Layer 4 w4.77: v1(494.43,243.52) 496.66,245.76 506.44,245.76 524.66,263.98 524.66,301.32 513.21,312.77 461.56,312.77 458.77,315.56 458.77,334.11 458.77,359.99 cw(c466.15,359.99) 466.15,367.37 504.59,367.37 ccw(c504.59,389.53) 504.59,411.68 442.35,411.68 cw(c442.35,419.07) 442.35,426.45 504.59,426.45 ccw(c504.59,448.61) 504.59,470.76 442.35,470.76 cw(c442.35,478.15) 442.35,485.53 504.59,485.53 ccw(c504.59,507.69) 504.59,529.84 466.15,529.84 cw(c466.15,537.23) 458.77,537.23 458.77,547 458.77,551.88 467.12,560.23 557.2,560.23 v1(604.85,607.88)
DDR3_LDM: U1.J1 U9.E7 | length 995.9
  Top Layer w5.61: v1(563.53,239) 563.77,239 574.77,228 U9.E7@575,228 ; v1(755.51,602.35) 757.83,604.67 766.63,604.67 U1.J1@783.15,621.19
  Layer 3 w5.61: v1(563.53,239) 564.26,239 576.26,227 599.63,227 610.17,237.54 610.17,248.05 621.01,258.89 630.16,258.89 641,269.74 641,292.99 644.29,296.28 644.29,332.29 645,333 647,335 647,337.81 ccw(c640.69,337.81) 640.69,344.11 625.18,344.11 cw(c625.18,350.42) 625.18,356.72 637.86,356.72 ccw(c637.86,363.03) 637.86,369.33 625.23,369.33 cw(c625.23,375.64) 625.23,381.94 637.86,381.94 ccw(c637.86,388.25) 637.86,394.55 625.23,394.55 cw(c625.23,400.86) 625.23,407.16 637.86,407.16 ccw(c637.86,413.47) 637.86,419.77 625.23,419.77 cw(c625.23,426.08) 625.23,432.38 637.86,432.38 ccw(c637.86,438.69) 637.86,444.99 625.23,444.99 cw(c625.23,451.3) 625.23,457.6 637.86,457.6 ccw(c637.86,463.91) 637.86,470.21 625.23,470.21 cw(c625.23,476.52) 625.23,482.82 637.86,482.82 ccw(c637.86,489.13) 637.86,495.43 625.23,495.43 cw(c625.23,501.74) 625.23,508.04 645.24,508.04 ccw(c645.24,514.35) 645.24,520.65 625.23,520.65 cw(c625.23,526.96) 625.23,533.26 637.7,533.26 ccw(c637.7,539.57) 644.01,539.57 644.01,552.22 644.01,552.72 650.29,559 666,559 705.58,598.58 705.58,643.01 716.57,654 729.43,654 745.14,638.29 745.14,637.18 758,624.31 758,616.81 757.83,616.64 757.83,604.67 v1(755.51,602.35)
DDR3_ODT: R35.1 U1.P1 U9.K1 | length 1047.2
  Top Layer w5.61: U9.K1@732.49,39.03 763,8.52 v1(763,8.16) 763,-25.96 756.96,-32 R35.1@753,-32 ; U1.P1@980,621.19 982.98,621.19 984.6,619.57 984.6,616.59 998.38,602.8 1005.52,602.8 v1(1007.83,600.49)
  Layer 4 w5.61: v1(763,8.16) 763,7 773,-3 952,-3 1101.61,146.61 1101.61,535.05 1058.13,578.53 1023.43,578.53 1012.63,589.32 1012.63,592.42 1007.83,597.22 v1(1007.83,600.49)
DDR3_RAS_N: U1.J4 U9.J3 | length 1082.1
  Top Layer w5.61: U9.J3@700.99,102.01 700.99,99.72 711.65,89.06 v1(711.65,86.76) ; v1(760.85,720.15) 762.42,720.15 781.57,739.3 U1.J4@783.15,739.3
  Layer 3 w5.61: v1(711.65,86.76) 711.65,115.65 735.08,139.08 735.08,198.08 765.16,228.16 765.16,281.57 816.59,333 885.33,401.74 885.33,558 885.33,763.67 860.58,788.42 722.42,788.42 706,772 706,754.44 721.39,739.05 741.94,739.05 759,721.99 v1@759,719
DDR3_RESET_N: R24.1 U1.F4 U9.T2 | length 1062.4
  Top Layer w5.61: v1(643.05,725.51) 643.6,726.05 651.79,726.05 U1.F4@665.04,739.3 ; U9.T2@921.46,70.52 939.08,70.52 v1(954.91,54.68) ; v1@957,53 958.68,54.68 1012.95,54.68 R24.1@1013.27,55
  Bottom Layer w5.61: v1(643.05,725.51) 644.82,723.74 686.27,723.74 703,707 703,585 687,569 687,198.12 757.12,128 928,128 948.01,107.99 948.01,82.66 954.91,75.76 v1(954.91,54.68)
DDR3_UDM: U1.E2 U9.D3 | length 1020.1
  Top Layer w5.61: v1(526.85,86.49) 527.42,86.49 542.94,102.02 U9.D3@543.51,102.01 ; v1(605.98,640.87) U1.E2@625.67,660.56
  Layer 4 w5.61: v1(526.85,86.49) 510,103.34 510,147 518.07,155.07 522.71,155.07 526,151.78 526,113.29 529.29,110 534.71,110 538,113.29 538,163 541.29,166.29 550.71,166.29 554,169.57 554,222 546,230 546,333 546,339 549,342 569,362 569,363.72 cw(c575.31,363.72) 575.31,370.03 582.69,370.03 ccw(c582.69,376.33) 582.69,382.64 573.7,382.64 cw(c573.7,388.94) 573.7,395.25 582.69,395.25 ccw(c582.69,401.55) 582.69,407.86 573.7,407.86 cw(c573.7,414.16) 573.7,420.47 582.69,420.47 ccw(c582.69,426.77) 582.69,433.08 573.71,433.08 cw(c573.71,439.38) 573.71,445.69 582.69,445.69 ccw(c582.69,451.99) 582.69,458.3 573.71,458.3 cw(c573.71,464.6) 573.71,470.91 582.69,470.91 ccw(c582.69,477.21) 582.69,483.52 573.71,483.52 cw(c573.71,489.82) 573.71,496.13 582.69,496.13 ccw(c582.69,502.43) 582.69,508.74 575.31,508.74 cw(c575.31,515.04) 569,515.04 569,533 570.48,534.48 576,540 597.22,540 659,601.78 659,613.71 650.71,622 624.86,622 608,638.86 v1@608,639
DDR3_VREF: C96.1 C100.2 C113.2 R26.1 R30.2 U9.H1 U9.M8 | length 1206.1
  Top Layer w5.61: v1(653.97,23.5) U9.H1@669.5,39.03 ; U9.M8@795.48,259.49 795.99,259.5 811.65,275.15 v1(812.15,275.15) ; v1(988,90) 975,103 975,219.73 981.23,225.96 1007.96,225.96 R26.1@1015,233 ; R26.1@1012,233 R26.1@1015,233 ; R26.1@1012,236 R30.2@1012,278.28 ; R30.2@1012,279.59 R30.2@1012,278.28 ; C96.1@1052,235 1050,233 R26.1@1015,233 ; C96.1@1054,235 1054,233 1056,233 C96.1@1057,234 ; C100.2@1056,278.28 R30.2@1012,278.28
  Bottom Layer w5.61: C113.2@653,24 715,24 746,-7 952,-7 982,23 982,82 ; v1(812.15,275.15) 759,222 744.67,222 735,212.33 735,185 770,150 950,150 982,118 v1@982,90
DDR3_WE_N: U1.M1 U9.L3 | length 997.8
  Top Layer w5.61: U9.L3@763.98,102.02 766.3,102.02 776.26,92.05 v1(778.79,92.05) ; U1.M1@901.26,621.19 901.42,621.19 922.54,600.07 v1(922.7,600.07)
  Layer 4 w5.61: v1(778.79,92.05) 778.79,89.72 798.14,70.38 813.99,70.38 844.94,39.42 874.06,39.42 886.47,51.82 886.47,60 ; 887,60 903,76 903,116 919,132 988,132 998,142 998,197 988,207 950,207 920.18,207 916.89,210.29 916.89,273 ; 917,273 930,286 958,286 972,300 994,300 1010,316 1010,506 941.83,574.17 941.83,582.25 924,600.07 v1(922.7,600.07)
FPGA_DONE: LED1.1 R12.2 U1.G11 | length 1111.1
  Top Layer w5.61: R12.2@216,486.73 252.78,486.73 271.1,468.4 LED1.1@280,468.4 281.1,468.4 297.75,485.05 297.75,486.16 383,571.41 v1(383,699) ; v1(685,998) 686.26,998 703.15,1014.89 U1.G11@704.41,1014.89
  Layer 4 w5.61: v1(383,699) 304,778 304,988 353,1037 646,1037 v1(685,998)
FPGA_GCLK: U1.R4 X1.3 | length 429
  Top Layer w5.61: U1.R4@1019.37,739.3 1020.29,739.3 1040.06,719.53 v1(1040.98,719.53) ; v1(1115.26,550.4) 1118.53,550.4 1123.03,545.89 1266.94,545.89 1297.37,515.46 X1.3@1299.34,515.46
  Bottom Layer w5.61: v1(1040.98,719.53) 1040.98,698.02 1101,638 1101,563.42 1114.02,550.4 v1(1115.26,550.4)
FPGA_M0: R9.2 U1.U11 | length 27.8
  Top Layer w5.61: U1.U11@1098.11,1014.89 v1(1117.8,995.2)
FPGA_M1: R10.2 U1.U10 | length 27.8
  Top Layer w5.61: U1.U10@1098.11,975.52 v1(1117.8,955.83)
FPGA_M2: R11.2 U1.U9 | length 27.8
  Top Layer w5.61: U1.U9@1098.11,936.15 v1(1117.8,916.46)
FPGA_PROG_B: R15.2 U1.N12 | length 27.2
  Top Layer w5.61: U1.N12@940.63,1054.26 940.63,1055.09 958.65,1073.11 v1(958.65,1073.95)
FPGA_TCK: R19.1 U1.V12 U3.3 | length 3096.7
  Top Layer w5.61: U1.V12@1137.48,1054.26 1139.03,1054.26 1155.62,1070.84 v1(1157.17,1070.84)
  Layer 3 w5.61: v1(997,1550) 1034,1550 1075.14,1591.14 1081.22,1591.14 1101.43,1570.93 1289.01,1570.93 1310.29,1592.21 1310.29,1622.31 1301,1631.6 1301,1661.66 1310.29,1670.95 1310.29,1689.98 1346.98,1726.67 1455,1726.67 1490,1761.67 1490,1890.91 1553.09,1954 1796.65,1954 1893.67,1856.98 1893.67,1336.82 v1(1844.84,1287.99)
  Bottom Layer w5.61: R19.1@959,1533.27 980.27,1533.27 v1(997,1550) ; v1(1157.17,1070.84) 1155,1068.68 1155,1045.49 1171.42,1029.07 1176.07,1029.07 1179.85,1032.85 1179.85,1087.88 1183.55,1091.57 1212.43,1091.57 1253,1051 1300,1051 1331.7,1019.3 1550.3,1019.3 1624.02,1093.02 1624.02,1376.02 1638.27,1390.27 1662.56,1390.27 U3.3@1664.53,1392.24 1718.82,1392.24 1786.81,1324.25 1808.58,1324.25 v1(1844.84,1287.99)
FPGA_TDI: R23.1 U1.R13 U3.9 | length 3186.6
  Top Layer w5.61: U1.R13@1019.37,1093.63 1020.78,1093.63 1037.65,1110.5 v1(1039.06,1110.5)
  Layer 3 w5.61: v1(1348.18,1650.78) 1362.22,1650.78 1370.5,1642.5 1370.5,1621.5 1386,1606 1443,1606 1528,1691 1548,1711 1548,1712.72 cw(c1554.31,1712.72) 1554.31,1719.03 1561.69,1719.03 ccw(c1561.69,1725.33) 1561.69,1731.64 1534.31,1731.64 cw(c1534.31,1737.94) 1534.31,1744.25 1561.69,1744.25 ccw(c1561.69,1750.55) 1561.69,1756.86 1534.31,1756.86 cw(c1534.31,1763.16) 1534.31,1769.47 1561.69,1769.47 ccw(c1561.69,1775.77) 1561.69,1782.08 1534.31,1782.08 cw(c1534.31,1788.38) 1534.31,1794.69 1561.69,1794.69 ccw(c1561.69,1800.99) 1561.69,1807.3 1534.31,1807.3 cw(c1534.31,1813.6) 1534.31,1819.91 1561.69,1819.91 ccw(c1561.69,1826.21) 1561.69,1832.52 1534.31,1832.52 cw(c1534.31,1838.82) 1534.31,1845.13 1560.04,1845.13 ccw(c1560.04,1851.43) 1560.04,1857.74 1541.69,1857.74 cw(c1541.69,1864.04) 1541.69,1870.35 ccw(c1541.69,1876.65) 1548,1876.65 1548,1886 1548,1908.14 1565.03,1925.17 1783.83,1925.17 1856,1853 1856,1366.35 1844.84,1355.19 v1(1844.84,1353.66)
  Bottom Layer w5.61: v1(1039.06,1110.5) 1039.06,1113.32 1066.43,1140.69 1125.69,1140.69 1137.66,1152.66 1198.57,1152.66 1204.49,1146.74 1249.51,1146.74 1346.64,1049.61 1539.84,1049.61 1595.19,1104.96 1595.19,1421.78 1626.41,1453 1662.83,1453 U3.9@1664.53,1451.3 1700.54,1451.3 1797.95,1353.89 1844.61,1353.89 v1(1844.84,1353.66) ; R23.1@1237,1541.27 1290.27,1541.27 1347,1598 1347,1649.6 v1(1348.18,1650.78)
FPGA_TDO: R20.1 U1.U13 U3.5 | length 3100.6
  Top Layer w5.61: U1.U13@1098.11,1093.63 1099.52,1093.63 1116.39,1110.5 v1(1117.8,1110.5)
  Layer 3 w5.61: v1(1079.68,1570.54) 1082.95,1570.54 1092.17,1561.32 1292.99,1561.32 1319.9,1588.23 1319.9,1635.22 1310.61,1644.52 1310.61,1657.68 1319.9,1666.97 1319.9,1686 1350.97,1717.06 1363,1717.06 1378.42,1717.06 cw(c1378.42,1710.76) 1384.72,1710.76 1384.72,1698.51 ccw(c1391.03,1698.51) 1397.33,1698.51 1397.33,1710.76 cw(c1403.64,1710.76) 1409.94,1710.76 1409.94,1698.51 ccw(c1416.25,1698.51) 1422.55,1698.51 1422.55,1710.76 cw(c1428.86,1710.76) 1435.16,1710.76 1435.16,1699.75 ccw(c1441.47,1699.75) 1447.77,1699.75 1447.77,1710.76 cw(c1454.08,1710.76) 1460.38,1710.76 ccw(c1466.69,1710.76) 1472.99,1710.76 1472.99,1728.46 cw(c1479.3,1728.46) 1474.84,1732.92 1494,1752.08 1499.61,1757.69 1499.61,1886.93 1557.07,1944.39 1792.67,1944.39 1884.06,1853 1884.06,1353.06 v1(1843,1312)
  Bottom Layer w5.61: R20.1@1038,1533.27 1063.28,1558.55 1067.25,1558.55 1079.24,1570.54 v1(1079.68,1570.54) ; v1(1117.8,1110.5) 1117.8,1107.23 1132.02,1093 1152.71,1093 1156,1096.29 1156,1109.2 1181.24,1134.44 1191.03,1134.44 1196.94,1128.52 1239.45,1128.52 1339.06,1028.91 1546.32,1028.91 1614.41,1097 1614.41,1389.41 1635.62,1410.62 1663.23,1410.62 U3.5@1664.53,1411.93 1712.73,1411.93 1789.99,1334.67 1811.75,1334.67 1826.74,1319.68 1832.05,1319.68 1839.73,1312 v1(1843,1312)
FPGA_TMS: R22.1 U1.T13 U3.7 | length 3132.6
  Top Layer w5.61: U1.T13@1058.74,1093.63 1060.15,1093.63 1077.02,1110.5 v1(1078.43,1110.5)
  Layer 3 w5.61: v1(1326.27,1651) 1357.86,1682.59 1368,1682.59 1383.42,1682.59 cw(c1383.42,1676.29) 1389.72,1676.29 1389.72,1622.18 ccw(c1396.03,1622.18) 1402.33,1622.18 1402.33,1676.29 cw(c1408.64,1676.29) 1414.94,1676.29 1414.94,1621.91 ccw(c1421.25,1621.91) 1427.55,1621.91 1427.55,1677.53 cw(c1433.86,1677.53) 1440.16,1677.53 1440.16,1641.27 ccw(c1446.47,1641.27) 1452.77,1641.27 1452.77,1676.29 cw(c1459.08,1676.29) 1459.08,1682.59 1481.18,1682.59 1482.59,1682.59 1512,1712 1512,1885.73 1561.05,1934.78 1787.81,1934.78 1868.97,1853.63 1868.97,1354.97 1848.67,1334.67 1833.89,1334.67 v1(1833.23,1335.33)
  Bottom Layer w5.61: v1(1078.43,1110.5) 1078.43,1113.32 1093.58,1128.47 1140.47,1128.47 1155.55,1143.55 1194.8,1143.55 1200.71,1137.63 1245.03,1137.63 1342.66,1040 1543.82,1040 1604.8,1100.98 1604.8,1404.87 1631.93,1432 1664.14,1432 U3.7@1664.53,1431.61 1706.64,1431.61 1793.97,1344.28 1821.01,1344.28 1829.96,1335.33 v1(1833.23,1335.33) ; R22.1@1155,1544.27 1195.2,1544.27 1208.84,1557.92 1276.92,1557.92 1326.27,1607.26 v1(1326.27,1651)